# Altium PCB BCK_REVA.PcbDoc (part 1 of 2)
Units mm, origin at the board's own origin, x right, y up, seen from the top; angles counter-clockwise.
Board outline 99.5 x 146.8 mm, 4 copper layers (Top Layer, Plane (MIXED), Plane (GND), Bottom Layer), stack 1.586 mm thick; 27 components, 72 nets, 792 pads, 1035 vias.
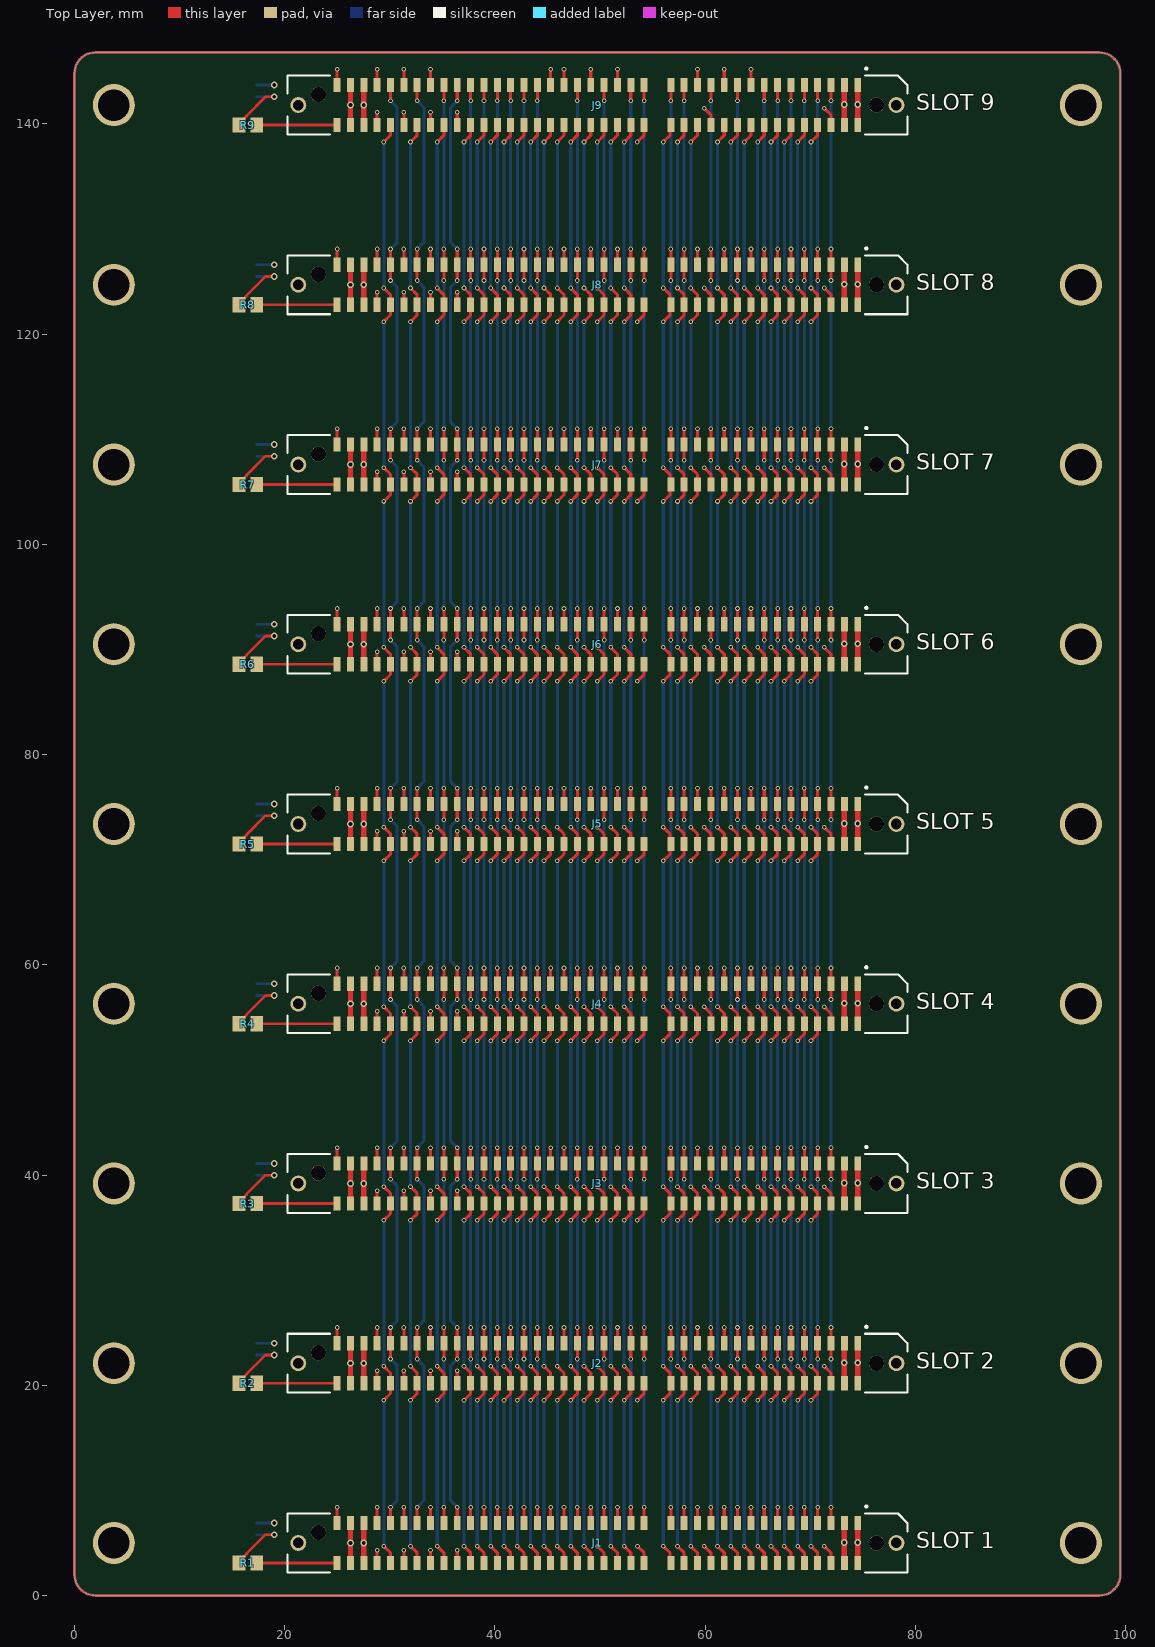
[diagram p0: Top Layer view]
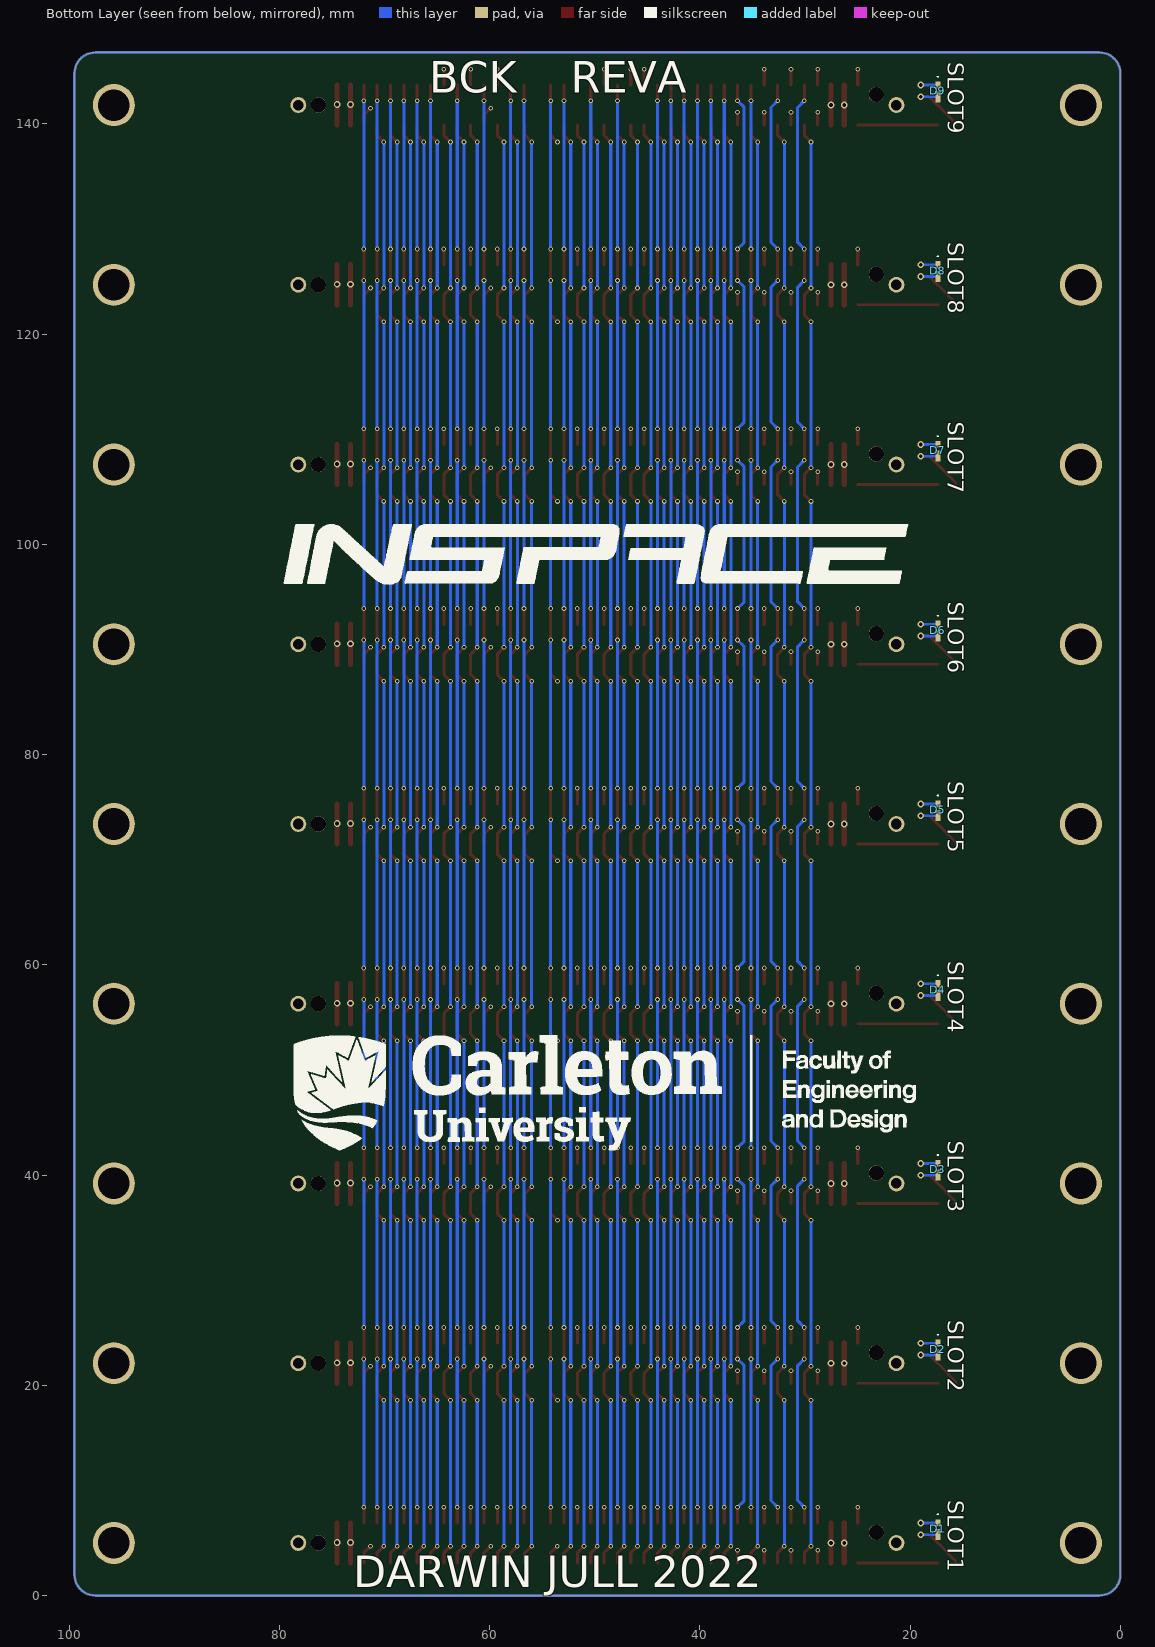
[diagram p1: Bottom Layer view, seen from below]
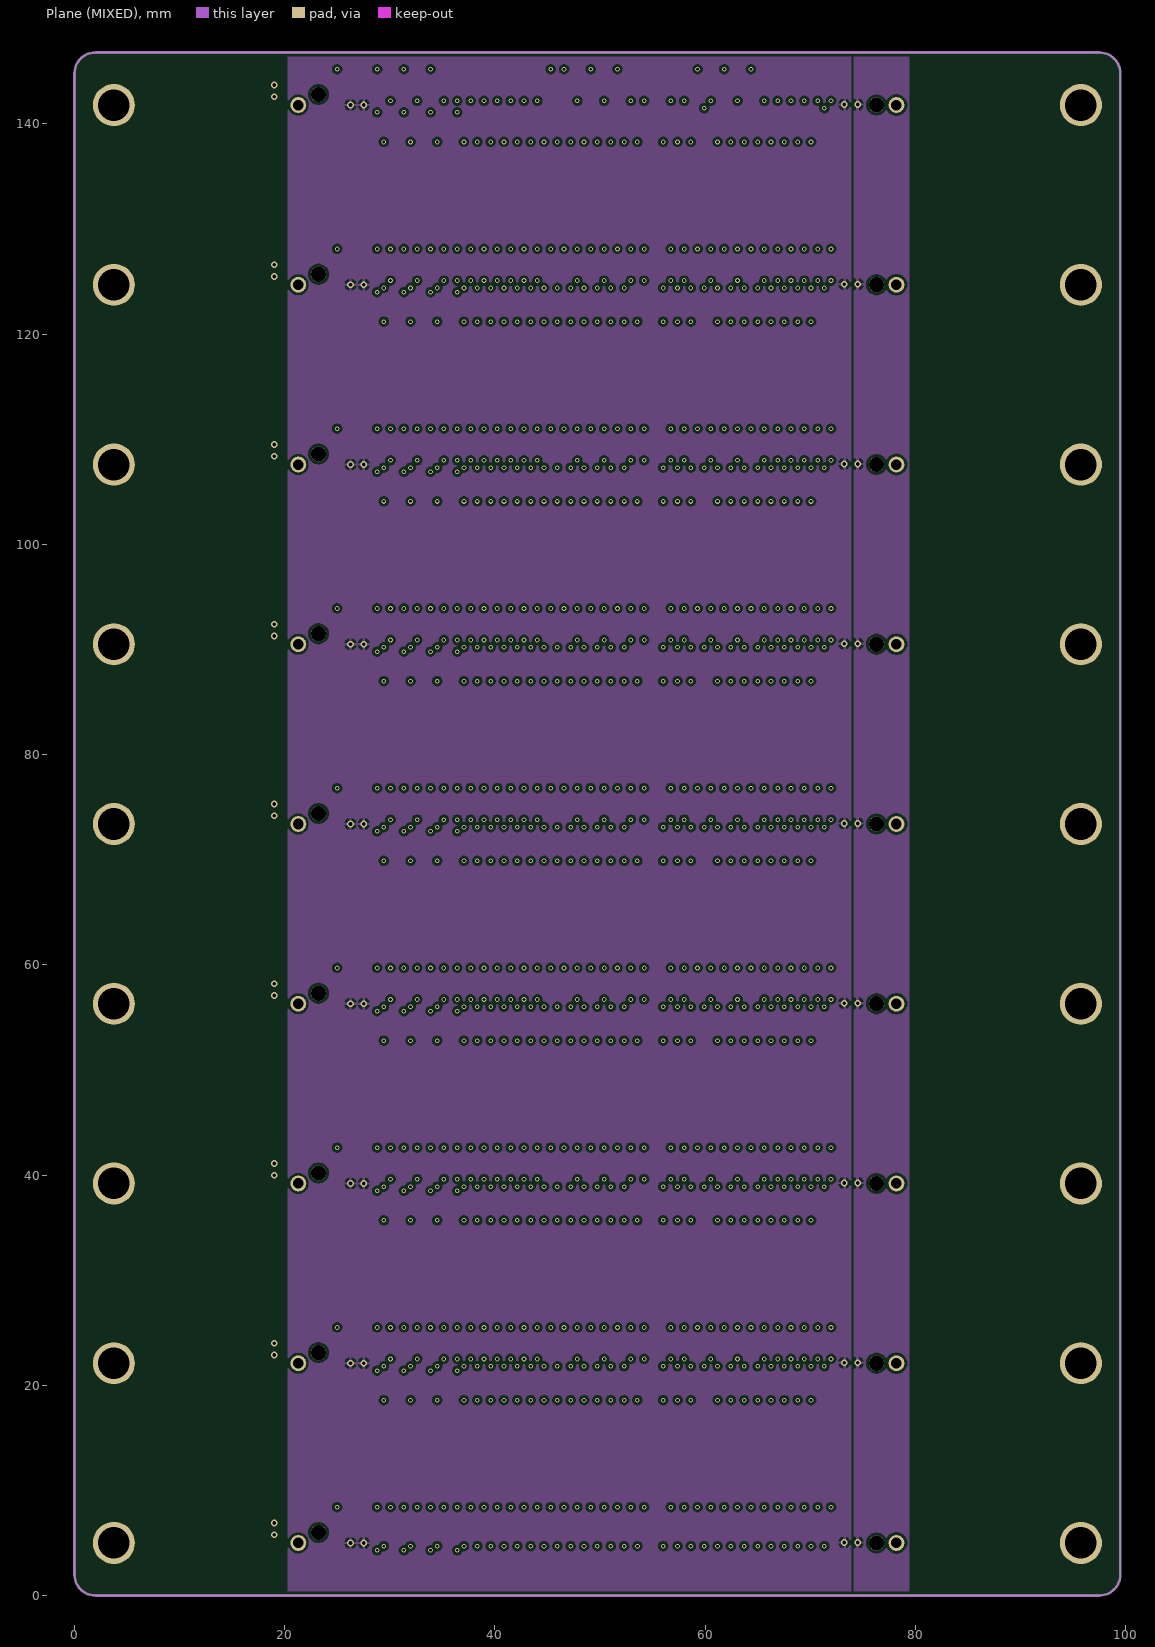
[diagram p2: Plane (MIXED)]
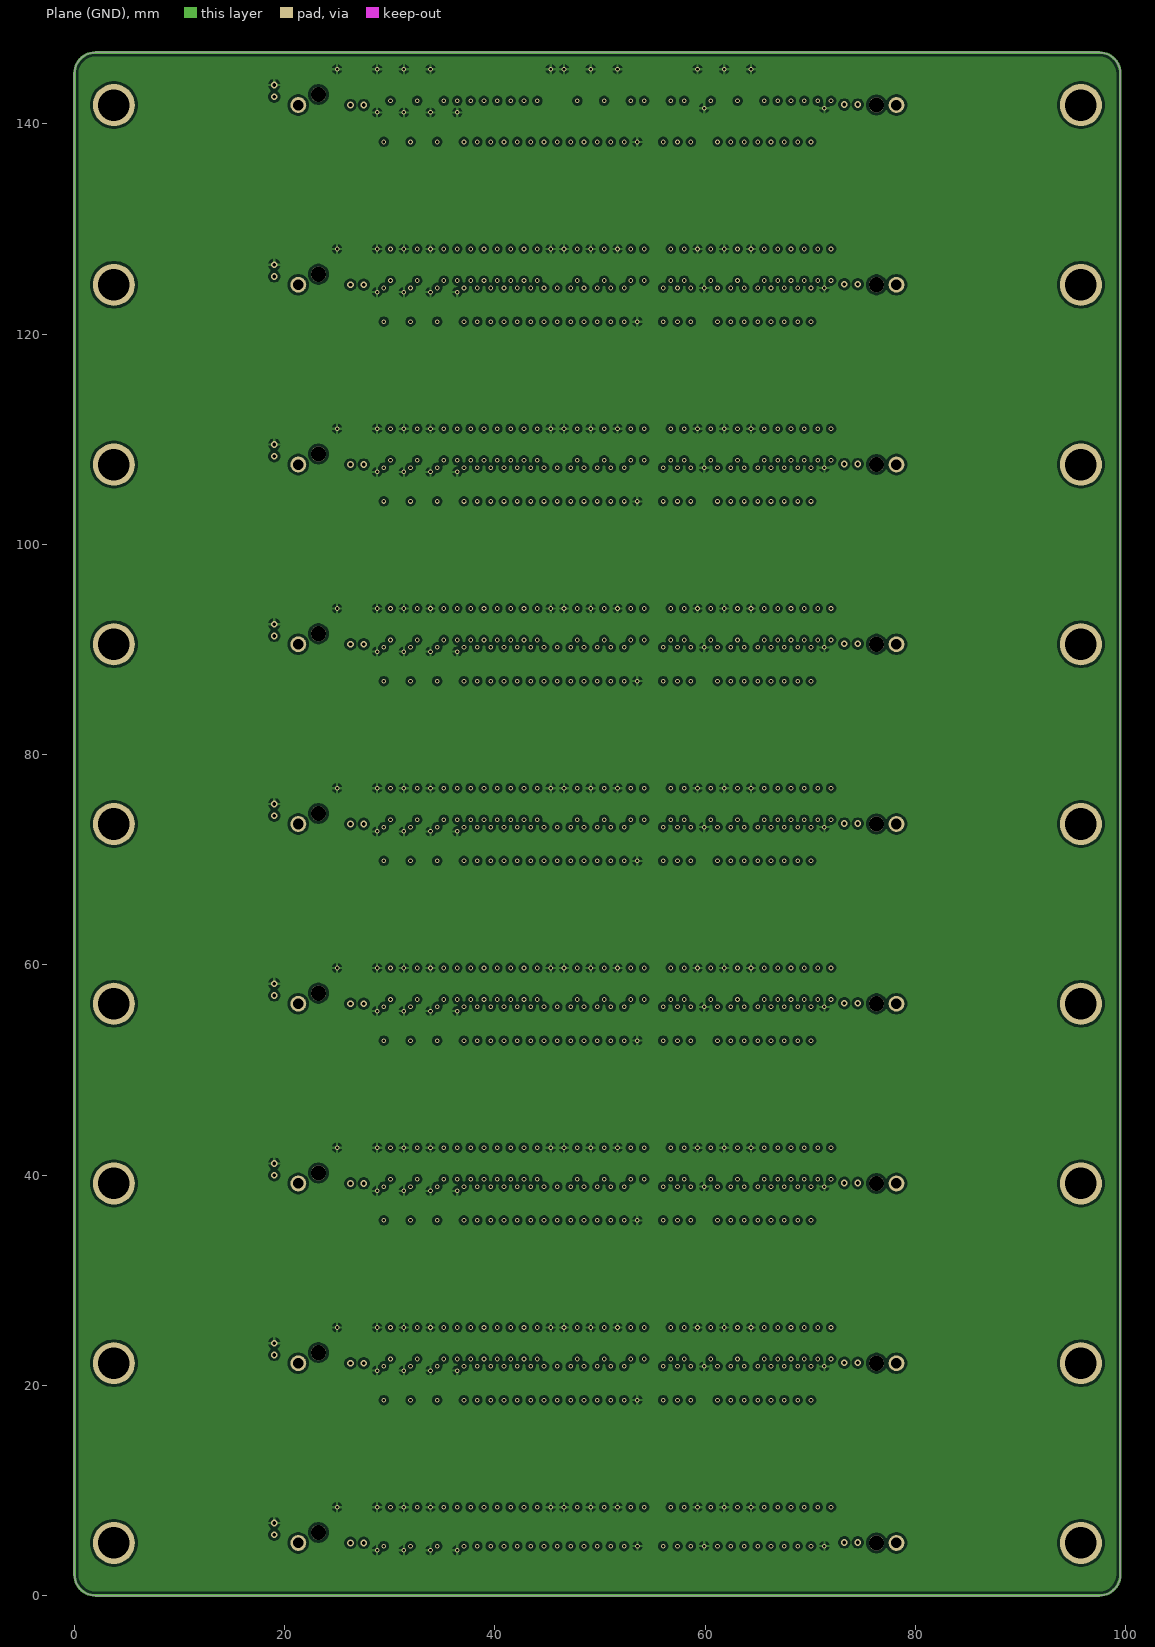
[diagram p3: Plane (GND)]

## Layer stack, top to bottom
Top Solder: solder mask 0.0203, Solder Resist, Dk 3.8
Top Layer: signal copper 0.035
Dielectric 2: prepreg 0.2104, PP-006, Dk 4.6
Plane (MIXED): signal copper 0.0152
Dielectric 1: core 1.065, FR-4, Dk 4.6
Plane (GND): signal copper 0.0152
Dielectric 3: prepreg 0.2104, PP-006, Dk 4.6
Bottom Layer: signal copper 0.035
Bottom Solder: solder mask 0.0203, Solder Resist, Dk 3.8

## Board outline
0,2 0,144.8 cw(c2,144.8) 2,146.8 97.5,146.8 cw(c97.5,144.8) 99.5,144.8 99.5,2 cw(c97.5,2) 97.5,0 2,0 cw(c2,2)

## Design rules (kind name [scope] priority, off if disabled: settings)
Clearance [All] p1: gap=0.254 ignorepadtopadclearanceinfootprint=TRUE except(0: Arc-Hole Track-Hole SMDPad-Hole THPad-Hole Via-Hole Fill-Hole Poly-Hole Region-Hole Text-Hole; 0.127: Arc-Arc Arc-Track Track-Track SMDPad-SMDPad THPad-THPad)
PlaneConnect [All] p1: pad.planeconnectstyle=Relief pad.reliefexpansion=0.508 pad.reliefentries=4 pad.reliefconductorwidth=0.254 pad.reliefairgap=0.254 via.planeconnectstyle=Direct via.reliefexpansion=0.508 via.reliefentries=4 via.reliefconductorwidth=0.254 via.reliefairgap=0.254
PolygonConnect [All] p1: connectstyle=Relief reliefconductorwidth=0.254 reliefentries=4 polygonreliefangle="90 Angle" airgapwidth=0.254
RoutingVias [All] p1: holewidth=0.254 width=0.445 viastyle="Through Hole" minholewidth=0.2 minwidth=0.4 maxholewidth=6.3 maxwidth=6.4
SolderMaskExpansion [All] p1: expansion=0.102 istentingtop=FALSE
Width [All] p1: maxlimit=2.5 minlimit=0.127 preferedwidth=0.293 midlayer1_minwidth=0.254 midlayer1_maxwidth=0.254 midlayer1_prefwidth=0.254 midlayer2_minwidth=0.254 midlayer2_maxwidth=0.254 midlayer2_prefwidth=0.254 minimp=50.000000 maximp=50.000000 favimp=50.000000
29 further rules are at their usual default settings.

## Classes and differential pairs
component class BCK_REVA_3: D7 D8 D9 J7 J8 J9 R7 R8 R9
component class BCK_REVA_2: D4 D5 D6 J4 J5 J6 R4 R5 R6
component class BCK_REVA: D1 D2 D3 J1 J2 J3 R1 R2 R3

## Components (designator, comment, footprint, x,y, rotation, side; value= is the part's Value field where it differs from the comment)
D1 "KP_DELPS1.FP-QISI-34-U515-2-S" KPDELPS1FPQISI34U5152S 17.35,6.26 r270 bottom locked
D2 "KP_DELPS1.FP-QISI-34-U515-2-S" KPDELPS1FPQISI34U5152S 17.35,23.36 r270 bottom locked
D3 "KP_DELPS1.FP-QISI-34-U515-2-S" KPDELPS1FPQISI34U5152S 17.35,40.46 r270 bottom locked
D4 "KP_DELPS1.FP-QISI-34-U515-2-S" KPDELPS1FPQISI34U5152S 17.35,57.56 r270 bottom locked
D5 "KP_DELPS1.FP-QISI-34-U515-2-S" KPDELPS1FPQISI34U5152S 17.35,74.66 r270 bottom locked
D6 "KP_DELPS1.FP-QISI-34-U515-2-S" KPDELPS1FPQISI34U5152S 17.35,91.76 r270 bottom locked
D7 "KP_DELPS1.FP-QISI-34-U515-2-S" KPDELPS1FPQISI34U5152S 17.35,108.86 r270 bottom locked
D8 "KP_DELPS1.FP-QISI-34-U515-2-S" KPDELPS1FPQISI34U5152S 17.35,125.96 r270 bottom locked
D9 "KP_DELPS1.FP-QISI-34-U515-2-S" KPDELPS1FPQISI34U5152S 17.35,143.06 r270 bottom locked
J1 "MECF-40-01-X-DV-WT" SAMTEC_MECF-40-01-X-DV-WT 49.75,5 r180 top locked
J2 "MECF-40-01-X-DV-WT" SAMTEC_MECF-40-01-X-DV-WT 49.75,22.1 r180 top locked
J3 "MECF-40-01-X-DV-WT" SAMTEC_MECF-40-01-X-DV-WT 49.75,39.2 r180 top locked
J4 "MECF-40-01-X-DV-WT" SAMTEC_MECF-40-01-X-DV-WT 49.75,56.3 r180 top locked
J5 "MECF-40-01-X-DV-WT" SAMTEC_MECF-40-01-X-DV-WT 49.75,73.4 r180 top locked
J6 "MECF-40-01-X-DV-WT" SAMTEC_MECF-40-01-X-DV-WT 49.75,90.5 r180 top locked
J7 "MECF-40-01-X-DV-WT" SAMTEC_MECF-40-01-X-DV-WT 49.75,107.6 r180 top locked
J8 "MECF-40-01-X-DV-WT" SAMTEC_MECF-40-01-X-DV-WT 49.75,124.7 r180 top locked
J9 "MECF-40-01-X-DV-WT" SAMTEC_MECF-40-01-X-DV-WT 49.75,141.8 r180 top locked
R1 "ERA6AEB201V" RESC2013X60X40NL20T25 16.5,3.095 r180 top locked
R2 "ERA6AEB201V" RESC2013X60X40NL20T25 16.5,20.195 r180 top
R3 "ERA6AEB201V" RESC2013X60X40NL20T25 16.5,37.295 r180 top locked
R4 "ERA6AEB201V" RESC2013X60X40NL20T25 16.5,54.395 r180 top locked
R5 "ERA6AEB201V" RESC2013X60X40NL20T25 16.5,71.495 r180 top locked
R6 "ERA6AEB201V" RESC2013X60X40NL20T25 16.5,88.595 r180 top locked
R7 "ERA6AEB201V" RESC2013X60X40NL20T25 16.5,105.695 r180 top locked
R8 "ERA6AEB201V" RESC2013X60X40NL20T25 16.5,122.795 r180 top locked
R9 "ERA6AEB201V" RESC2013X60X40NL20T25 16.5,139.895 r180 top locked

## Footprints (in the part's own frame and the unit in brackets; to place one, negate y for a bottom-side part, rotate by r counter-clockwise, add the part's x,y. Pads: shape width x height; smd on the part's side, far side on the other; paste and mask are expansions set on the pad)
KPDELPS1FPQISI34U5152S [mm]
  rect 0.7x0.5 smd: 1(-0.645,0)
  rect 1.05x0.5 smd: 2(0.47,0)
  silkscreen extent -1.5,-0.05 -1.4,0.05
RESC2013X60X40NL20T25 [mm] "Chip Resistor, 2-Leads, Body 2.00x1.25mm, IPC Medium Density"
  rect 1.2x1.45 smd: 1(-0.85,0) 2(0.85,0)
  body extent -1.1,-0.72 1.1,0.72, height 0.6
SAMTEC_MECF-40-01-X-DV-WT [mm]
  rect 0.66x1.35 smd: 01(-24.765,-1.905) 02(-24.765,1.905) 03(-23.495,-1.905) 04(-23.495,1.905) 05(-22.225,-1.905) 06(-22.225,1.905) 07(-20.955,-1.905) 08(-20.955,1.905) 09(-19.685,-1.905) 10(-19.685,1.905) 11(-18.415,-1.905) 12(-18.415,1.905) 13(-17.145,-1.905) 14(-17.145,1.905) 15(-15.875,-1.905) 16(-15.875,1.905) 17(-14.605,-1.905) 18(-14.605,1.905) 19(-13.335,-1.905) 20(-13.335,1.905) 21(-12.065,-1.905) 22(-12.065,1.905) 23(-10.795,-1.905) 24(-10.795,1.905) 25(-9.525,-1.905) 26(-9.525,1.905) 27(-8.255,-1.905) 28(-8.255,1.905) 29(-6.985,-1.905) 30(-6.985,1.905) 31(-4.445,-1.905) 32(-4.445,1.905) 33(-3.175,-1.905) 34(-3.175,1.905) 35(-1.905,-1.905) 36(-1.905,1.905) 37(-0.635,-1.905) 38(-0.635,1.905) 39(0.635,-1.905) 40(0.635,1.905) 41(1.905,-1.905) 42(1.905,1.905) 43(3.175,-1.905) 44(3.175,1.905) 45(4.445,-1.905) 46(4.445,1.905) 47(5.715,-1.905) 48(5.715,1.905) 49(6.985,-1.905) 50(6.985,1.905) 51(8.255,-1.905) 52(8.255,1.905) 53(9.525,-1.905) 54(9.525,1.905) 55(10.795,-1.905) 56(10.795,1.905) 57(12.065,-1.905) 58(12.065,1.905) 59(13.335,-1.905) 60(13.335,1.905) 61(14.605,-1.905) 62(14.605,1.905) 63(15.875,-1.905) 64(15.875,1.905) 65(17.145,-1.905) 66(17.145,1.905) 67(18.415,-1.905) 68(18.415,1.905) 69(19.685,-1.905) 70(19.685,1.905) 71(20.955,-1.905) 72(20.955,1.905) 73(22.225,-1.905) 74(22.225,1.905) 75(23.495,-1.905) 76(23.495,1.905) 77(24.765,-1.905) 78(24.765,1.905)
  round 1.508 hole 1: S1(-28.45,0) S2(28.45,0)
  round 1.45 hole 1.45 unplated: ""(-26.55,0) ""(26.54,-1)
  silkscreen extent -29.49,-3.56 29.49,2.8

## Part data
D1 D2 D3 D4 D5 D6 D7 D8 D9: "High Power LEDs - Single Color Pure Green TOPLED E1608", Manufacturer_Name="AMS OSRAM GROUP", Manufacturer_Part_Number="KP DELPS1.FP-QISI-34-U515-2-S", Mouser Part Number=720-KPDELPS1FPA0817, Datasheet Link=https://www.dialog-semiconductor.com/sites/default/files/2021-09/DA14531_datasheet_3v4.pdf, Geometry.Height=0.7mm, Mouser Price/Stock=https://www.mouser.co.uk/ProductDetail/ams-OSRAM/KP-DELPS1FP-QISI-34-U515-2-S?qs=CiayqK2gdcI39hBNO3GmaQ%3D%3D
J1 J2 J3 J4 J5 J6 J7 J8 J9: "MECF .050\" EDGE CARD ASSEMBLY", Package=None, Availability=Unavailable, MF=Samtec, MP=MECF-40-01-X-DV-WT, Price=None
R1 R2 R3 R4 R5 R6 R7 R8 R9: library part CMP-2001-00608-1, Manufacturer=Panasonic, Part Number=ERA6AEB201V

## Free pads (board coordinates)
  round 4 hole 3: 1(3.75,5) 2(3.75,22.1) 3(3.75,39.2) 4(3.75,56.3) 5(3.75,73.4) 6(3.75,90.5) 7(3.75,107.6) 8(3.75,124.7) 9(3.75,141.8) 10(95.75,5) 11(95.75,22.1) 12(95.75,39.2) 13(95.75,56.3) 14(95.75,73.4) 15(95.75,90.5) 16(95.75,107.6) 17(95.75,124.7) 18(95.75,141.8)

## Via types
v1: diameter 0.445, hole 0.254, Top Layer to Bottom Layer, 961 vias
v2: diameter 0.635, hole 0.356, Top Layer to Bottom Layer, 56 vias
v3: diameter 0.444, hole 0.254, Top Layer to Bottom Layer, 18 vias

## Nets (pads, with @x,y where several pads share a name; then routed paths per layer and width w, separated by ;. In a path a pad name is that pad's centre, name@x,y a point inside that pad or via, vN(x,y) a via of type N, cw(c..) or ccw(c..) an arc to the next point about the centre after c; other vN are vias at no path point)
+3.3V: J1.03 J1.04 J1.73 J1.74 J1.75 J1.76 J2.03 J2.04 J2.73 J2.74 J2.75 J2.76 J3.03 J3.04 J3.73 J3.74 J3.75 J3.76 J4.03 J4.04 J4.73 J4.74 J4.75 J4.76 J5.03 J5.04 J5.73 J5.74 J5.75 J5.76 J6.03 J6.04 J6.73 J6.74 J6.75 J6.76 J7.03 J7.04 J7.73 J7.74 J7.75 J7.76 J8.03 J8.04 J8.73 J8.74 J8.75 J8.76 J9.03 J9.04 J9.73 J9.74 J9.75 J9.76 | length 106.7
  Top Layer w0.5: J1.76@26.255,3.095 J1.75@26.255,6.905 ; J2.76@26.255,20.195 J2.75@26.255,24.005 ; J3.76@26.255,37.295 J3.75@26.255,41.105 ; J4.76@26.255,54.395 J4.75@26.255,58.205 ; J5.76@26.255,71.495 J5.75@26.255,75.305 ; J6.76@26.255,88.595 J6.75@26.255,92.405 ; J7.76@26.255,105.695 J7.75@26.255,109.505 ; J8.76@26.255,122.795 J8.75@26.255,126.605 ; J9.76@26.255,139.895 J9.75@26.255,143.705 ; J1.74@27.525,3.095 J1.73@27.525,6.905 ; J2.74@27.525,20.195 J2.73@27.525,24.005 ; J3.74@27.525,37.295 J3.73@27.525,41.105 ; J4.74@27.525,54.395 J4.73@27.525,58.205 ; J5.74@27.525,71.495 J5.73@27.525,75.305 ; J6.74@27.525,88.595 J6.73@27.525,92.405 ; J7.74@27.525,105.695 J7.73@27.525,109.505 ; J8.74@27.525,122.795 J8.73@27.525,126.605 ; J9.74@27.525,139.895 J9.73@27.525,143.705 ; J1.04@73.245,3.095 v2(73.245,5.045) J1.03@73.245,6.905 ; J3.04@73.245,37.295 v2(73.245,39.245) J3.03@73.245,41.105 ; J4.04@73.245,54.395 v2(73.245,56.345) J4.03@73.245,58.205 ; J5.04@73.245,71.495 v2(73.245,73.445) J5.03@73.245,75.305 ; J6.04@73.245,88.595 v2(73.245,90.545) J6.03@73.245,92.405 ; J7.04@73.245,105.695 v2(73.245,107.645) J7.03@73.245,109.505 ; J8.04@73.245,122.795 v2(73.245,124.745) J8.03@73.245,126.605 ; J9.04@73.245,139.895 v2(73.245,141.845) J9.03@73.245,143.705 ; v2(73.245,22.145) J2.03@73.245,24.005 v2(73.245,22.145) ; v2(73.245,22.145) J2.04@73.245,20.195 v2(73.245,22.145)
  other v2: 26.255,5 27.525,5 26.255,22.1 27.525,22.1 73.245,22.145 26.255,39.2 27.525,39.2 26.255,56.3 27.525,56.3 26.255,73.4 27.525,73.4 26.255,90.5 27.525,90.5 26.255,107.6 27.525,107.6 26.255,124.7 27.525,124.7 26.255,141.8 27.525,141.8
+5V: J1.01 J1.02 J2.01 J2.02 J3.01 J3.02 J4.01 J4.02 J5.01 J5.02 J6.01 J6.02 J7.01 J7.02 J8.01 J8.02 J9.01 J9.02 | length 34.3
  Top Layer w0.5: J1.02@74.515,3.095 v2(74.515,5.045) J1.01@74.515,6.905 ; J2.02@74.515,20.195 v2(74.515,22.145) J2.01@74.515,24.005 ; J3.02@74.515,37.295 v2(74.515,39.245) J3.01@74.515,41.105 ; J4.02@74.515,54.395 v2(74.515,56.345) J4.01@74.515,58.205 ; J5.02@74.515,71.495 v2(74.515,73.445) J5.01@74.515,75.305 ; J6.02@74.515,88.595 v2(74.515,90.545) J6.01@74.515,92.405 ; J7.02@74.515,105.695 v2(74.515,107.645) J7.01@74.515,109.505 ; J8.02@74.515,122.795 v2(74.515,124.745) J8.01@74.515,126.605 ; J9.02@74.515,139.895 v2(74.515,141.845) J9.01@74.515,143.705
A0: J1.22 J2.22 J3.22 J4.22 J5.22 J6.22 J7.22 J8.22 J9.22 | length 141
  Top Layer w0.293: v1(61.18,4.7) 61.815,4.065 J1.22@61.815,3.095 ; v1(61.18,18.59) 61.815,19.225 J2.22@61.815,20.195 61.815,21.165 v1(61.18,21.8) ; v1(61.18,35.69) 61.815,36.325 J3.22@61.815,37.295 61.815,38.265 v1(61.18,38.9) ; v1(61.18,52.79) 61.815,53.425 J4.22@61.815,54.395 61.815,55.365 v1(61.18,56) ; v1(61.18,69.89) 61.815,70.525 J5.22@61.815,71.495 61.815,72.465 v1(61.18,73.1) ; v1(61.18,86.99) 61.815,87.625 J6.22@61.815,88.595 61.815,89.565 v1(61.18,90.2) ; v1(61.18,104.09) 61.815,104.725 J7.22@61.815,105.695 61.815,106.665 v1(61.18,107.3) ; v1(61.18,121.19) 61.815,121.825 61.815,123.765 v1(61.18,124.4) ; v1(61.18,138.29) 61.815,138.925 J9.22@61.815,139.895
  Bottom Layer w0.293: v1(61.18,4.7) v1(61.18,18.59) ; v1(61.18,21.8) v1(61.18,35.69) ; v1(61.18,38.9) v1(61.18,52.79) ; v1(61.18,56) v1(61.18,69.89) ; v1(61.18,73.1) v1(61.18,86.99) ; v1(61.18,90.2) v1(61.18,104.09) ; v1(61.18,107.3) v1(61.18,121.19) ; v1(61.18,124.4) v1(61.18,138.29)
A1: J1.20 J2.20 J3.20 J4.20 J5.20 J6.20 J7.20 J8.20 J9.20 | length 141
  Top Layer w0.293: v1(62.45,4.7) 63.085,4.065 J1.20@63.085,3.095 ; v1(62.45,18.59) 63.085,19.225 63.085,21.165 v1(62.45,21.8) ; v1(62.45,35.69) 63.085,36.325 63.085,38.265 v1(62.45,38.9) ; v1(62.45,52.79) 63.085,53.425 63.085,55.365 v1(62.45,56) ; v1(62.45,69.89) 63.085,70.525 63.085,72.465 v1(62.45,73.1) ; v1(62.45,86.99) 63.085,87.625 63.085,89.565 v1(62.45,90.2) ; v1(62.45,104.09) 63.085,104.725 63.085,106.665 v1(62.45,107.3) ; v1(62.45,121.19) 63.085,121.825 63.085,123.765 v1(62.45,124.4) ; v1(62.45,138.29) 63.085,138.925 J9.20@63.085,139.895
  Bottom Layer w0.293: v1(62.45,4.7) v1(62.45,18.59) ; v1(62.45,21.8) v1(62.45,35.69) ; v1(62.45,38.9) v1(62.45,52.79) ; v1(62.45,56) v1(62.45,69.89) ; v1(62.45,73.1) v1(62.45,86.99) ; v1(62.45,90.2) v1(62.45,104.09) ; v1(62.45,107.3) v1(62.45,121.19) ; v1(62.45,124.4) v1(62.45,138.29)
A2: J1.18 J2.18 J3.18 J4.18 J5.18 J6.18 J7.18 J8.18 J9.18 | length 141
  Top Layer w0.293: v1(63.72,4.7) 64.355,4.065 J1.18@64.355,3.095 ; v1(63.72,18.59) 64.355,19.225 J2.18@64.355,20.195 64.355,21.165 v1(63.72,21.8) ; v1(63.72,35.69) 64.355,36.325 J3.18@64.355,37.295 64.355,38.265 v1(63.72,38.9) ; v1(63.72,52.79) 64.355,53.425 J4.18@64.355,54.395 64.355,55.365 v1(63.72,56) ; v1(63.72,69.89) 64.355,70.525 J5.18@64.355,71.495 64.355,72.465 v1(63.72,73.1) ; v1(63.72,86.99) 64.355,87.625 J6.18@64.355,88.595 64.355,89.565 v1(63.72,90.2) ; v1(63.72,104.09) 64.355,104.725 64.355,106.665 v1(63.72,107.3) ; v1(63.72,121.19) 64.355,121.825 64.355,123.765 v1(63.72,124.4) ; v1(63.72,138.29) 64.355,138.925 J9.18@64.355,139.895
  Bottom Layer w0.293: v1(63.72,4.7) v1(63.72,18.59) ; v1(63.72,21.8) v1(63.72,35.69) ; v1(63.72,38.9) v1(63.72,52.79) ; v1(63.72,56) v1(63.72,69.89) ; v1(63.72,73.1) v1(63.72,86.99) ; v1(63.72,90.2) v1(63.72,104.09) ; v1(63.72,107.3) v1(63.72,121.19) ; v1(63.72,124.4) v1(63.72,138.29)
A3: J1.16 J2.16 J3.16 J4.16 J5.16 J6.16 J7.16 J8.16 J9.16 | length 141
  Top Layer w0.293: v1(64.99,4.7) 65.625,4.065 J1.16@65.625,3.095 ; v1(64.99,18.59) v1@65,18.6 ; v1(64.99,21.8) 65.625,21.165 65.625,19.225 v1@65,18.6 ; v1(64.99,35.69) 65.625,36.325 J3.16@65.625,37.295 65.625,38.265 v1(64.99,38.9) ; v1(64.99,52.79) 65.625,53.425 J4.16@65.625,54.395 65.625,55.365 v1(64.99,56) ; v1(64.99,69.89) 65.625,70.525 J5.16@65.625,71.495 65.625,72.465 v1(64.99,73.1) ; v1(64.99,86.99) 65.625,87.625 J6.16@65.625,88.595 65.625,89.565 v1(64.99,90.2) ; v1(64.99,104.09) 65.625,104.725 65.625,106.665 v1(64.99,107.3) ; v1(64.99,121.19) 65.625,121.825 65.625,123.765 v1(64.99,124.4) ; v1(64.99,138.29) 65.625,138.925 J9.16@65.625,139.895 ; v1@65,18.59 v1@65,18.6
  Bottom Layer w0.293: v1(64.99,4.7) v1(64.99,18.59) ; v1(64.99,38.9) v1(64.99,52.79) ; v1(64.99,56) v1(64.99,69.89) ; v1(64.99,73.1) v1(64.99,86.99) ; v1(64.99,90.2) v1(64.99,104.09) ; v1(64.99,107.3) v1(64.99,121.19) ; v1(64.99,124.4) v1(64.99,138.29) ; v1@64.995,21.805 v1(64.99,21.8) v1(64.99,35.69) v1@64.995,35.685
A4: J1.14 J2.14 J3.14 J4.14 J5.14 J6.14 J7.14 J8.14 J9.14 | length 141.2
  Top Layer w0.293: v1(66.26,4.7) 66.895,4.065 J1.14@66.895,3.095 ; v1(66.26,18.59) 66.895,19.225 J2.14@66.895,20.195 66.895,21.165 v1(66.26,21.8) ; v1(66.26,35.69) 66.895,36.325 J3.14@66.895,37.295 66.895,38.265 v1(66.26,38.9) ; v1(66.26,52.79) 66.895,53.425 J4.14@66.895,54.395 66.895,55.365 v1(66.26,56) ; v1(66.26,69.89) 66.895,70.525 J5.14@66.895,71.495 66.895,72.465 v1(66.26,73.1) ; v1(66.26,86.99) 66.895,87.625 J6.14@66.895,88.595 66.895,89.565 v1(66.26,90.2) ; v1(66.26,104.09) 66.895,104.725 J7.14@66.895,105.695 66.895,106.665 v1(66.26,107.3) ; v1(66.26,121.19) 66.895,121.825 J8.14@66.895,122.795 66.895,123.765 v1(66.26,124.4) ; v1(66.26,138.29) 66.895,138.925 J9.14@66.895,139.895 ; v1@66.3,35.69 v1@66.3,35.727 ; v1@66.3,52.79 v1@66.3,52.827 ; v1@66.3,69.89 v1@66.3,69.927 ; v1@66.3,86.99 v1@66.3,87.027 ; v1@66.3,104.09 v1@66.3,104.127 ; v1@66.3,121.19 v1@66.3,121.227
  Bottom Layer w0.293: v1(66.26,4.7) v1(66.26,18.59) ; v1(66.26,21.8) v1(66.26,35.69) ; v1(66.26,38.9) v1(66.26,52.79) ; v1(66.26,56) v1(66.26,69.89) ; v1(66.26,73.1) v1(66.26,86.99) ; v1(66.26,90.2) v1(66.26,104.09) ; v1(66.26,107.3) v1(66.26,121.19) ; v1(66.26,124.4) v1(66.26,138.29)
A5: J1.12 J2.12 J3.12 J4.12 J5.12 J6.12 J7.12 J8.12 J9.12 | length 141
  Top Layer w0.293: v1(67.53,4.7) 68.165,4.065 J1.12@68.165,3.095 ; v1(67.53,18.59) 68.165,19.225 68.165,21.165 v1(67.53,21.8) ; v1(67.53,35.69) 68.165,36.325 68.165,38.265 v1(67.53,38.9) ; v1(67.53,52.79) 68.165,53.425 J4.12@68.165,54.395 68.165,55.365 v1(67.53,56) ; v1(67.53,69.89) 68.165,70.525 J5.12@68.165,71.495 68.165,72.465 v1(67.53,73.1) ; v1(67.53,86.99) 68.165,87.625 68.165,89.565 v1(67.53,90.2) ; v1(67.53,104.09) 68.165,104.725 J7.12@68.165,105.695 68.165,106.665 v1(67.53,107.3) ; v1(67.53,121.19) 68.165,121.825 J8.12@68.165,122.795 68.165,123.765 v1(67.53,124.4) ; v1(67.53,138.29) 68.165,138.925 J9.12@68.165,139.895
  Bottom Layer w0.293: v1(67.53,4.7) v1(67.53,18.59) ; v1(67.53,21.8) v1(67.53,35.69) ; v1(67.53,38.9) v1(67.53,52.79) ; v1(67.53,56) v1(67.53,69.89) ; v1(67.53,73.1) v1(67.53,86.99) ; v1(67.53,90.2) v1(67.53,104.09) ; v1(67.53,107.3) v1(67.53,121.19) ; v1(67.53,124.4) v1(67.53,138.29)
A6: J1.10 J2.10 J3.10 J4.10 J5.10 J6.10 J7.10 J8.10 J9.10 | length 141
  Top Layer w0.293: v1(68.8,4.7) 69.435,4.065 J1.10@69.435,3.095 ; v1(68.8,18.59) 69.435,19.225 J2.10@69.435,20.195 69.435,21.165 v1(68.8,21.8) ; v1(68.8,35.69) 69.435,36.325 69.435,38.265 v1(68.8,38.9) ; v1(68.8,52.79) 69.435,53.425 69.435,55.365 v1(68.8,56) ; v1(68.8,69.89) 69.435,70.525 69.435,72.465 v1(68.8,73.1) ; v1(68.8,86.99) 69.435,87.625 69.435,89.565 v1(68.8,90.2) ; v1(68.8,104.09) 69.435,104.725 69.435,106.665 v1(68.8,107.3) ; v1(68.8,121.19) 69.435,121.825 69.435,123.765 v1(68.8,124.4) ; v1(68.8,138.29) 69.435,138.925 J9.10@69.435,139.895
  Bottom Layer w0.293: v1(68.8,4.7) v1(68.8,18.59) ; v1(68.8,21.8) v1(68.8,35.69) ; v1(68.8,38.9) v1(68.8,52.79) ; v1(68.8,56) v1(68.8,69.89) ; v1(68.8,73.1) v1(68.8,86.99) ; v1(68.8,90.2) v1(68.8,104.09) ; v1(68.8,107.3) v1(68.8,121.19) ; v1(68.8,124.4) v1(68.8,138.29)
A7: J1.08 J2.08 J3.08 J4.08 J5.08 J6.08 J7.08 J8.08 J9.08 | length 141
  Top Layer w0.293: v1(70.07,4.7) 70.705,4.065 J1.08@70.705,3.095 ; v1(70.07,18.59) 70.705,19.225 70.705,21.165 v1(70.07,21.8) ; v1(70.07,35.69) 70.705,36.325 J3.08@70.705,37.295 70.705,38.265 v1(70.07,38.9) ; v1(70.07,52.79) 70.705,53.425 J4.08@70.705,54.395 70.705,55.365 v1(70.07,56) ; v1(70.07,69.89) 70.705,70.525 J5.08@70.705,71.495 70.705,72.465 v1(70.07,73.1) ; v1(70.07,86.99) 70.705,87.625 J6.08@70.705,88.595 70.705,89.565 v1(70.07,90.2) ; v1(70.07,104.09) 70.705,104.725 J7.08@70.705,105.695 70.705,106.665 v1(70.07,107.3) ; v1(70.07,121.19) 70.705,121.825 70.705,123.765 v1(70.07,124.4) ; v1(70.07,138.29) 70.705,138.925 J9.08@70.705,139.895
  Bottom Layer w0.293: v1(70.07,4.7) v1(70.07,18.59) ; v1(70.07,21.8) v1(70.07,35.69) ; v1(70.07,38.9) v1(70.07,52.79) ; v1(70.07,56) v1(70.07,69.89) ; v1(70.07,73.1) v1(70.07,86.99) ; v1(70.07,90.2) v1(70.07,104.09) ; v1(70.07,107.3) v1(70.07,121.19) ; v1(70.07,124.4) v1(70.07,138.29) ; v1@70.076,18.584 v1@70.082,18.59 ; v1@70.076,69.884 v1@70.082,69.89 ; v1@70.076,86.984 v1@70.082,86.99
A12: J1.31 J2.31 J3.31 J4.31 J5.31 J6.31 J7.31 J8.31 J9.31 | length 136.8
  Top Layer w0.293: J1.31@54.195,6.905 v1(54.195,8.405) ; v1(54.195,22.505) J2.31@54.195,24.005 v1(54.195,25.505) ; v1(54.195,39.605) J3.31@54.195,41.105 v1(54.195,42.605) ; v1(54.195,56.705) J4.31@54.195,58.205 v1(54.195,59.705) ; v1(54.195,73.805) J5.31@54.195,75.305 v1(54.195,76.805) ; v1(54.195,90.905) J6.31@54.195,92.405 v1(54.195,93.905) ; v1(54.195,108.005) J7.31@54.195,109.505 v1(54.195,111.005) ; v1(54.195,125.105) J8.31@54.195,126.605 v1(54.195,128.105) ; v1(54.195,142.205) J9.31@54.195,143.705
  Bottom Layer w0.293: v1(54.195,8.405) v1(54.195,22.505) ; v1(54.195,25.505) v1(54.195,39.605) ; v1(54.195,42.605) v1(54.195,56.705) ; v1(54.195,59.705) v1(54.195,73.805) ; v1(54.195,76.805) v1(54.195,90.905) ; v1(54.195,93.905) v1(54.195,108.005) ; v1(54.195,111.005) v1(54.195,125.105) ; v1(54.195,128.105) v1(54.195,142.205)
A13: J1.33 J2.33 J3.33 J4.33 J5.33 J6.33 J7.33 J8.33 J9.33 | length 136.8
  Top Layer w0.293: J1.33@52.925,6.905 v1(52.925,8.405) ; v1(52.925,22.505) J2.33@52.925,24.005 v1(52.925,25.505) ; v1(52.925,39.605) J3.33@52.925,41.105 v1(52.925,42.605) ; v1(52.925,56.705) J4.33@52.925,58.205 v1(52.925,59.705) ; v1(52.925,73.805) J5.33@52.925,75.305 v1(52.925,76.805) ; v1(52.925,90.905) J6.33@52.925,92.405 v1(52.925,93.905) ; v1(52.925,108.005) J7.33@52.925,109.505 v1(52.925,111.005) ; v1(52.925,125.105) J8.33@52.925,126.605 v1(52.925,128.105) ; v1(52.925,142.205) J9.33@52.925,143.705
  Bottom Layer w0.293: v1(52.925,8.405) v1(52.925,22.505) ; v1(52.925,25.505) v1(52.925,39.605) ; v1(52.925,42.605) v1(52.925,56.705) ; v1(52.925,59.705) v1(52.925,73.805) ; v1(52.925,76.805) v1(52.925,90.905) ; v1(52.925,93.905) v1(52.925,108.005) ; v1(52.925,111.005) v1(52.925,125.105) ; v1(52.925,128.105) v1(52.925,142.205)
DAC0: J1.41 J2.41 J3.41 J4.41 J5.41 J6.41 J7.41 J8.41 J9.41 | length 136.8
  Top Layer w0.293: J1.41@47.845,6.905 v1(47.845,8.405) ; v1(47.845,22.505) J2.41@47.845,24.005 v1(47.845,25.505) ; v1(47.845,39.605) J3.41@47.845,41.105 v1(47.845,42.605) ; v1(47.845,56.705) J4.41@47.845,58.205 v1(47.845,59.705) ; v1(47.845,73.805) J5.41@47.845,75.305 v1(47.845,76.805) ; v1(47.845,90.905) J6.41@47.845,92.405 v1(47.845,93.905) ; v1(47.845,108.005) J7.41@47.845,109.505 v1(47.845,111.005) ; v1(47.845,125.105) J8.41@47.845,126.605 v1(47.845,128.105) ; v1(47.845,142.205) J9.41@47.845,143.705
  Bottom Layer w0.293: v1(47.845,8.405) v1(47.845,22.505) ; v1(47.845,25.505) v1(47.845,39.605) ; v1(47.845,42.605) v1(47.845,56.705) ; v1(47.845,59.705) v1(47.845,73.805) ; v1(47.845,76.805) v1(47.845,90.905) ; v1(47.845,93.905) v1(47.845,108.005) ; v1(47.845,111.005) v1(47.845,125.105) ; v1(47.845,128.105) v1(47.845,142.205)
DAC1: J1.37 J2.37 J3.37 J4.37 J5.37 J6.37 J7.37 J8.37 J9.37 | length 136.8
  Top Layer w0.293: J1.37@50.385,6.905 v1(50.385,8.405) ; v1(50.385,22.505) J2.37@50.385,24.005 v1(50.385,25.505) ; v1(50.385,39.605) J3.37@50.385,41.105 v1(50.385,42.605) ; v1(50.385,56.705) J4.37@50.385,58.205 v1(50.385,59.705) ; v1(50.385,73.805) J5.37@50.385,75.305 v1(50.385,76.805) ; v1(50.385,90.905) J6.37@50.385,92.405 v1(50.385,93.905) ; v1(50.385,108.005) J7.37@50.385,109.505 v1(50.385,111.005) ; v1(50.385,125.105) J8.37@50.385,126.605 v1(50.385,128.105) ; v1(50.385,142.205) J9.37@50.385,143.705
  Bottom Layer w0.293: v1(50.385,8.405) v1(50.385,22.505) ; v1(50.385,25.505) v1(50.385,39.605) ; v1(50.385,42.605) v1(50.385,56.705) ; v1(50.385,59.705) v1(50.385,73.805) ; v1(50.385,76.805) v1(50.385,90.905) ; v1(50.385,93.905) v1(50.385,108.005) ; v1(50.385,111.005) v1(50.385,125.105) ; v1(50.385,128.105) v1(50.385,142.205)
GND: D1.1 D2.1 D3.1 D4.1 D5.1 D6.1 D7.1 D8.1 D9.1 J1.06 J1.17 J1.21 J1.24 J1.25 J1.32 J1.35 J1.39 J1.43 J1.45 J1.60 J1.63 J1.64 J1.67 J1.68 J1.71 J1.72 J1.77 J2.06 J2.17 J2.21 J2.24 J2.25 J2.32 J2.35 J2.39 J2.43 J2.45 J2.60 J2.63 J2.64 J2.67 J2.68 J2.71 J2.72 J2.77 J3.06 J3.17 J3.21 J3.24 J3.25 J3.32 J3.35 J3.39 J3.43 J3.45 J3.60 J3.63 J3.64 J3.67 J3.68 J3.71 J3.72 J3.77 J4.06 J4.17 J4.21 J4.24 J4.25 J4.32 J4.35 J4.39 J4.43 J4.45 J4.60 J4.63 J4.64 J4.67 J4.68 J4.71 J4.72 J4.77 J5.06 J5.17 J5.21 J5.24 J5.25 J5.32 J5.35 J5.39 J5.43 J5.45 J5.60 J5.63 J5.64 J5.67 J5.68 J5.71 J5.72 J5.77 J6.06 J6.17 J6.21 J6.24 J6.25 J6.32 J6.35 J6.39 J6.43 J6.45 J6.60 J6.63 J6.64 J6.67 J6.68 J6.71 J6.72 J6.77 J7.06 J7.17 J7.21 J7.24 J7.25 J7.32 J7.35 J7.39 J7.43 J7.45 J7.60 J7.63 J7.64 J7.67 J7.68 J7.71 J7.72 J7.77 J8.06 J8.17 J8.21 J8.24 J8.25 J8.32 J8.35 J8.39 J8.43 J8.45 J8.60 J8.63 J8.64 J8.67 J8.68 J8.71 J8.72 J8.77 J9.06 J9.17 J9.21 J9.24 J9.25 J9.32 J9.35 J9.39 J9.43 J9.45 J9.60 J9.63 J9.64 J9.67 J9.68 J9.71 J9.72 J9.77 | length 257.2
  Top Layer w0.293: J1.77@24.985,6.905 v3(24.985,8.405) ; J2.77@24.985,24.005 v3(24.985,25.505) ; J3.77@24.985,41.105 v3(24.985,42.605) ; J4.77@24.985,58.205 v3(24.985,59.705) ; J5.77@24.985,75.305 v3(24.985,76.805) ; J6.77@24.985,92.405 v3(24.985,93.905) ; J7.77@24.985,109.505 v3(24.985,111.005) ; J8.77@24.985,126.605 v3(24.985,128.105) ; J9.77@24.985,143.705 v3(24.985,145.205) ; J1.72@28.795,3.095 v1(28.795,4.299) ; J1.71@28.795,6.905 v3(28.795,8.405) ; J2.72@28.795,20.195 v1(28.795,21.399) ; J2.71@28.795,24.005 v3(28.795,25.505) ; J3.72@28.795,37.295 v1(28.795,38.499) ; J3.71@28.795,41.105 v3(28.795,42.605) ; J4.72@28.795,54.395 v1(28.795,55.599) ; J4.71@28.795,58.205 v3(28.795,59.705) ; J5.72@28.795,71.495 v1(28.795,72.699) ; J5.71@28.795,75.305 v3(28.795,76.805) ; J6.72@28.795,88.595 v1(28.795,89.799) ; J6.71@28.795,92.405 v3(28.795,93.905) ; J7.72@28.795,105.695 v1(28.795,106.899) ; J7.71@28.795,109.505 v3(28.795,111.005) ; J8.72@28.795,122.795 v1(28.795,123.999) ; J8.71@28.795,126.605 v3(28.795,128.105) ; J9.72@28.795,139.895 v1(28.795,141.099) ; J9.71@28.795,143.705 v3(28.795,145.205) ; J1.68@31.335,3.095 v1(31.335,4.299) ; J1.67@31.335,6.905 v1(31.335,8.405) ; J2.68@31.335,20.195 v1(31.335,21.399) ; J2.67@31.335,24.005 v1(31.335,25.505) ; J3.68@31.335,37.295 v1(31.335,38.499) ; J3.67@31.335,41.105 v1(31.335,42.605) ; J4.68@31.335,54.395 v1(31.335,55.599) ; J4.67@31.335,58.205 v1(31.335,59.705) ; J5.68@31.335,71.495 v1(31.335,72.699) ; J5.67@31.335,75.305 v1(31.335,76.805) ; J6.68@31.335,88.595 v1(31.335,89.799) ; J6.67@31.335,92.405 v1(31.335,93.905) ; J7.68@31.335,105.695 v1(31.335,106.899) ; J7.67@31.335,109.505 v1(31.335,111.005) ; J8.68@31.335,122.795 v1(31.335,123.999) ; J8.67@31.335,126.605 v1(31.335,128.105) ; J9.68@31.335,139.895 v1(31.335,141.099) ; J9.67@31.335,143.705 v1(31.335,145.205) ; J1.64@33.875,3.095 v1(33.875,4.299) ; J1.63@33.875,6.905 v1(33.875,8.405) ; J2.64@33.875,20.195 v1(33.875,21.399) ; J2.63@33.875,24.005 v1(33.875,25.505) ; J3.64@33.875,37.295 v1(33.875,38.499) ; J3.63@33.875,41.105 v1(33.875,42.605) ; J4.64@33.875,54.395 v1(33.875,55.599) ; J4.63@33.875,58.205 v1(33.875,59.705) ; J5.64@33.875,71.495 v1(33.875,72.699) ; J5.63@33.875,75.305 v1(33.875,76.805) ; J6.64@33.875,88.595 v1(33.875,89.799) ; J6.63@33.875,92.405 v1(33.875,93.905) ; J7.64@33.875,105.695 v1(33.875,106.899) ; J7.63@33.875,109.505 v1(33.875,111.005) ; J8.64@33.875,122.795 v1(33.875,123.999) ; J8.63@33.875,126.605 v1(33.875,128.105) ; J9.64@33.875,139.895 v1(33.875,141.099) ; J9.63@33.875,143.705 v1(33.875,145.205) ; J1.60@36.415,3.095 v1(36.415,4.299) ; J2.60@36.415,20.195 v1(36.415,21.399) ; J3.60@36.415,37.295 v1(36.415,38.499) ; J4.60@36.415,54.395 v1(36.415,55.599) ; J5.60@36.415,71.495 v1(36.415,72.699) ; J6.60@36.415,88.595 v1(36.415,89.799) ; J7.60@36.415,105.695 v1(36.415,106.899) ; J8.60@36.415,122.795 v1(36.415,123.999) ; J9.60@36.415,139.895 v1(36.415,141.099) ; J1.45@45.305,6.905 v1(45.305,8.405) ; J2.45@45.305,24.005 v1(45.305,25.505) ; J3.45@45.305,41.105 v1(45.305,42.605) ; J4.45@45.305,58.205 v1(45.305,59.705) ; J5.45@45.305,75.305 v1(45.305,76.805) ; J6.45@45.305,92.405 v1(45.305,93.905) ; J7.45@45.305,109.505 v1(45.305,111.005) ; J8.45@45.305,126.605 v1(45.305,128.105) ; J9.45@45.305,143.705 v1(45.305,145.205) ; J1.43@46.575,6.905 v1(46.575,8.405) ; J2.43@46.575,24.005 v1(46.575,25.505) ; J3.43@46.575,41.105 v1(46.575,42.605) ; J4.43@46.575,58.205 v1(46.575,59.705) ; J5.43@46.575,75.305 v1(46.575,76.805) ; J6.43@46.575,92.405 v1(46.575,93.905) ; J7.43@46.575,109.505 v1(46.575,111.005) ; J8.43@46.575,126.605 v1(46.575,128.105) ; J9.43@46.575,143.705 v1(46.575,145.205) ; J1.39@49.115,6.905 v1(49.115,8.405) ; J2.39@49.115,24.005 v1(49.115,25.505) ; J3.39@49.115,41.105 v1(49.115,42.605) ; J4.39@49.115,58.205 v1(49.115,59.705) ; J5.39@49.115,75.305 v1(49.115,76.805) ; J6.39@49.115,92.405 v1(49.115,93.905) ; J7.39@49.115,109.505 v1(49.115,111.005) ; J8.39@49.115,126.605 v1(49.115,128.105) ; J9.39@49.115,143.705 v1(49.115,145.205) ; J1.35@51.655,6.905 v1(51.655,8.405) ; J2.35@51.655,24.005 v1(51.655,25.505) ; J3.35@51.655,41.105 v1(51.655,42.605) ; J4.35@51.655,58.205 v1(51.655,59.705) ; J5.35@51.655,75.305 v1(51.655,76.805) ; J6.35@51.655,92.405 v1(51.655,93.905) ; J7.35@51.655,109.505 v1(51.655,111.005) ; J8.35@51.655,126.605 v1(51.655,128.105) ; J9.35@51.655,143.705 v1(51.655,145.205) ; v1(53.548,18.59) 54.195,19.237 J2.32@54.195,20.195 ; v1(53.548,35.69) 54.195,36.337 J3.32@54.195,37.295 ; v1(53.548,52.79) 54.195,53.437 J4.32@54.195,54.395 ; v1(53.548,69.89) 54.195,70.537 J5.32@54.195,71.495 ; v1(53.548,86.99) 54.195,87.637 J6.32@54.195,88.595 ; v1(53.548,104.09) 54.195,104.737 J7.32@54.195,105.695 ; v1(53.548,121.19) 54.195,121.837 J8.32@54.195,122.795 ; v1(53.548,138.29) 54.195,138.937 J9.32@54.195,139.895 ; v1(53.56,4.7) 54.195,4.065 J1.32@54.195,3.095 ; J1.25@59.275,6.905 v1(59.275,8.405) ; J2.25@59.275,24.005 v1(59.275,25.505) ; J3.25@59.275,41.105 v1(59.275,42.605) ; J4.25@59.275,58.205 v1(59.275,59.705) ; J5.25@59.275,75.305 v1(59.275,76.805) ; J6.25@59.275,92.405 v1(59.275,93.905) ; J7.25@59.275,109.505 v1(59.275,111.005) ; J8.25@59.275,126.605 v1(59.275,128.105) ; J9.25@59.275,143.705 v1(59.275,145.205) ; v1(59.91,4.7) 60.545,4.065 J1.24@60.545,3.095 ; v1(59.91,21.8) 60.545,21.165 J2.24@60.545,20.195 ; v1(59.91,38.9) 60.545,38.265 J3.24@60.545,37.295 ; v1(59.91,56) 60.545,55.365 J4.24@60.545,54.395 ; v1(59.91,73.1) 60.545,72.465 J5.24@60.545,71.495 ; v1(59.91,90.2) 60.545,89.565 J6.24@60.545,88.595 ; v1(59.91,107.3) 60.545,106.665 J7.24@60.545,105.695 ; v1(59.91,124.4) 60.545,123.765 J8.24@60.545,122.795 ; v1(59.91,141.5) 60.545,140.865 J9.24@60.545,139.895 ; J1.21@61.815,6.905 v1(61.815,8.405) ; J2.21@61.815,24.005 v1(61.815,25.505) ; J3.21@61.815,41.105 v1(61.815,42.605) ; J4.21@61.815,58.205 v1(61.815,59.705) ; J5.21@61.815,75.305 v1(61.815,76.805) ; J6.21@61.815,92.405 v1(61.815,93.905) ; J7.21@61.815,109.505 v1(61.815,111.005) ; J8.21@61.815,126.605 v1(61.815,128.105) ; J9.21@61.815,143.705 v1(61.815,145.205) ; J1.17@64.355,6.905 v1(64.355,8.405) ; v1(64.355,25.505) J2.17@64.355,24.005 J2.17@64.364,24.014 ; J3.17@64.355,41.105 v1(64.355,42.605) ; J4.17@64.355,58.205 v1(64.355,59.705) ; J5.17@64.355,75.305 v1(64.355,76.805) ; J6.17@64.355,92.405 v1(64.355,93.905) ; J7.17@64.355,109.505 v1(64.355,111.005) ; J8.17@64.355,126.605 v1(64.355,128.105) ; J9.17@64.355,143.705 v1(64.355,145.205) ; v1@64.364,25.496 v1@64.373,25.505 ; v1(71.34,4.7) 71.975,4.065 J1.06@71.975,3.095 ; v1(71.34,21.8) 71.975,21.165 J2.06@71.975,20.195 ; v1(71.34,38.9) 71.975,38.265 J3.06@71.975,37.295 ; v1(71.34,56) 71.975,55.365 J4.06@71.975,54.395 ; v1(71.34,73.1) 71.975,72.465 J5.06@71.975,71.495 ; v1(71.34,90.2) 71.975,89.565 J6.06@71.975,88.595 ; v1(71.34,107.3) 71.975,106.665 J7.06@71.975,105.695 ; v1(71.34,124.4) 71.975,123.765 J8.06@71.975,122.795 ; v1(71.34,141.5) 71.975,140.865 J9.06@71.975,139.895
  Bottom Layer w0.254: D1.1@17.35,6.905 17.353,6.903 18.998,6.903 v2(19,6.9) ; D2.1@17.35,24.005 17.353,24.002 18.998,24.002 v2(19,24) ; D3.1@17.35,41.105 17.353,41.102 18.998,41.102 v2(19,41.1) ; D4.1@17.35,58.205 17.353,58.203 18.998,58.203 v2(19,58.2) ; D5.1@17.35,75.305 17.353,75.303 18.998,75.303 v2(19,75.3) ; D6.1@17.35,92.405 17.353,92.403 18.998,92.403 v2(19,92.4) ; D7.1@17.35,109.505 17.353,109.502 18.998,109.502 v2(19,109.5) ; D8.1@17.35,126.605 17.353,126.602 18.998,126.602 v2(19,126.6) ; D9.1@17.35,143.705 17.353,143.702 18.998,143.702 v2(19,143.7)
GPIO0: J1.58 J2.58 J3.58 J4.58 J5.58 J6.58 J7.58 J8.58 J9.58 | length 141
  Top Layer w0.293: v1(37.05,4.7) 37.685,4.065 J1.58@37.685,3.095 ; v1(37.05,18.59) 37.685,19.225 J2.58@37.685,20.195 37.685,21.165 v1(37.05,21.8) ; v1(37.05,35.69) 37.685,36.325 37.685,38.265 v1(37.05,38.9) ; v1(37.05,52.79) 37.685,53.425 37.685,55.365 v1(37.05,56) ; v1(37.05,69.89) 37.685,70.525 37.685,72.465 v1(37.05,73.1) ; v1(37.05,86.99) 37.685,87.625 37.685,89.565 v1(37.05,90.2) ; v1(37.05,104.09) 37.685,104.725 37.685,106.665 v1(37.05,107.3) ; v1(37.05,121.19) 37.685,121.825 37.685,123.765 v1(37.05,124.4) ; v1(37.05,138.29) 37.685,138.925 J9.58@37.685,139.895
  Bottom Layer w0.293: v1(37.05,4.7) v1(37.05,18.59) ; v1(37.05,21.8) v1(37.05,35.69) ; v1(37.05,38.9) v1(37.05,52.79) ; v1(37.05,56) v1(37.05,69.89) ; v1(37.05,73.1) v1(37.05,86.99) ; v1(37.05,90.2) v1(37.05,104.09) ; v1(37.05,107.3) v1(37.05,121.19) ; v1(37.05,124.4) v1(37.05,138.29)
GPIO1: J1.56 J2.56 J3.56 J4.56 J5.56 J6.56 J7.56 J8.56 J9.56 | length 141
  Top Layer w0.293: v1(38.32,4.7) 38.955,4.065 J1.56@38.955,3.095 ; v1(38.32,18.59) 38.955,19.225 J2.56@38.955,20.195 38.955,21.165 v1(38.32,21.8) ; v1(38.32,35.69) 38.955,36.325 38.955,38.265 v1(38.32,38.9) ; v1(38.32,52.79) 38.955,53.425 38.955,55.365 v1(38.32,56) ; v1(38.32,69.89) 38.955,70.525 38.955,72.465 v1(38.32,73.1) ; v1(38.32,86.99) 38.955,87.625 38.955,89.565 v1(38.32,90.2) ; v1(38.32,104.09) 38.955,104.725 38.955,106.665 v1(38.32,107.3) ; v1(38.32,121.19) 38.955,121.825 38.955,123.765 v1(38.32,124.4) ; v1(38.32,138.29) 38.955,138.925 J9.56@38.955,139.895
  Bottom Layer w0.293: v1(38.32,4.7) v1(38.32,18.59) ; v1(38.32,21.8) v1(38.32,35.69) ; v1(38.32,38.9) v1(38.32,52.79) ; v1(38.32,56) v1(38.32,69.89) ; v1(38.32,73.1) v1(38.32,86.99) ; v1(38.32,90.2) v1(38.32,104.09) ; v1(38.32,107.3) v1(38.32,121.19) ; v1(38.32,124.4) v1(38.32,138.29)
GPIO2: J1.54 J2.54 J3.54 J4.54 J5.54 J6.54 J7.54 J8.54 J9.54 | length 141
  Top Layer w0.293: v1(39.59,4.7) 40.225,4.065 J1.54@40.225,3.095 ; v1(39.59,18.59) 40.225,19.225 J2.54@40.225,20.195 40.225,21.165 v1(39.59,21.8) ; v1(39.59,35.69) 40.225,36.325 40.225,38.265 v1(39.59,38.9) ; v1(39.59,52.79) 40.225,53.425 40.225,55.365 v1(39.59,56) ; v1(39.59,69.89) 40.225,70.525 40.225,72.465 v1(39.59,73.1) ; v1(39.59,86.99) 40.225,87.625 40.225,89.565 v1(39.59,90.2) ; v1(39.59,104.09) 40.225,104.725 40.225,106.665 v1(39.59,107.3) ; v1(39.59,121.19) 40.225,121.825 40.225,123.765 v1(39.59,124.4) ; v1(39.59,138.29) 40.225,138.925 J9.54@40.225,139.895
  Bottom Layer w0.293: v1(39.59,4.7) v1(39.59,18.59) ; v1(39.59,21.8) v1(39.59,35.69) ; v1(39.59,38.9) v1(39.59,52.79) ; v1(39.59,56) v1(39.59,69.89) ; v1(39.59,73.1) v1(39.59,86.99) ; v1(39.59,90.2) v1(39.59,104.09) ; v1(39.59,107.3) v1(39.59,121.19) ; v1(39.59,124.4) v1(39.59,138.29)
GPIO3: J1.52 J2.52 J3.52 J4.52 J5.52 J6.52 J7.52 J8.52 J9.52 | length 141
  Top Layer w0.293: v1(40.86,4.7) 41.495,4.065 J1.52@41.495,3.095 ; v1(40.86,18.59) 41.495,19.225 J2.52@41.495,20.195 41.495,21.165 v1(40.86,21.8) ; v1(40.86,35.69) 41.495,36.325 41.495,38.265 v1(40.86,38.9) ; v1(40.86,52.79) 41.495,53.425 41.495,55.365 v1(40.86,56) ; v1(40.86,69.89) 41.495,70.525 41.495,72.465 v1(40.86,73.1) ; v1(40.86,86.99) 41.495,87.625 41.495,89.565 v1(40.86,90.2) ; v1(40.86,104.09) 41.495,104.725 41.495,106.665 v1(40.86,107.3) ; v1(40.86,121.19) 41.495,121.825 41.495,123.765 v1(40.86,124.4) ; v1(40.86,138.29) 41.495,138.925 J9.52@41.495,139.895
  Bottom Layer w0.293: v1(40.86,4.7) v1(40.86,18.59) ; v1(40.86,21.8) v1(40.86,35.69) ; v1(40.86,38.9) v1(40.86,52.79) ; v1(40.86,56) v1(40.86,69.89) ; v1(40.86,73.1) v1(40.86,86.99) ; v1(40.86,90.2) v1(40.86,104.09) ; v1(40.86,107.3) v1(40.86,121.19) ; v1(40.86,124.4) v1(40.86,138.29)
GPIO4: J1.50 J2.50 J3.50 J4.50 J5.50 J6.50 J7.50 J8.50 J9.50 | length 142.9
  Top Layer w0.293: v1(42.13,4.7) 42.765,4.065 J1.50@42.765,3.095 ; v1(42.13,18.59) 42.765,19.225 ; v1(42.13,21.8) 42.765,21.165 ; v1(42.13,35.69) 42.765,36.325 42.765,38.265 v1(42.13,38.9) ; v1(42.13,52.79) 42.765,53.425 42.765,55.365 v1(42.13,56) ; v1(42.13,69.89) 42.765,70.525 42.765,72.465 v1(42.13,73.1) ; v1(42.13,86.99) 42.765,87.625 42.765,89.565 v1(42.13,90.2) ; v1(42.13,104.09) 42.765,104.725 42.765,106.665 v1(42.13,107.3) ; v1(42.13,121.19) 42.765,121.825 42.765,123.765 v1(42.13,124.4) ; v1(42.13,138.29) 42.765,138.925 J9.50@42.765,139.895 ; 42.765,19.225 42.765,21.165 ; 42.765,19.225 42.765,21.165
  Bottom Layer w0.293: v1(42.13,4.7) v1(42.13,18.59) ; v1(42.13,21.8) v1(42.13,35.69) ; v1(42.13,38.9) v1(42.13,52.79) ; v1(42.13,56) v1(42.13,69.89) ; v1(42.13,73.1) v1(42.13,86.99) ; v1(42.13,90.2) v1(42.13,104.09) ; v1(42.13,107.3) v1(42.13,121.19) ; v1(42.13,124.4) v1(42.13,138.29)
GPIO5: J1.48 J2.48 J3.48 J4.48 J5.48 J6.48 J7.48 J8.48 J9.48 | length 141
  Top Layer w0.293: v1(43.4,4.7) 44.035,4.065 J1.48@44.035,3.095 ; v1(43.4,18.59) 44.035,19.225 J2.48@44.035,20.195 44.035,21.165 v1(43.4,21.8) ; v1(43.4,35.69) 44.035,36.325 44.035,38.265 v1(43.4,38.9) ; v1(43.4,52.79) 44.035,53.425 44.035,55.365 v1(43.4,56) ; v1(43.4,69.89) 44.035,70.525 44.035,72.465 v1(43.4,73.1) ; v1(43.4,86.99) 44.035,87.625 44.035,89.565 v1(43.4,90.2) ; v1(43.4,104.09) 44.035,104.725 44.035,106.665 v1(43.4,107.3) ; v1(43.4,121.19) 44.035,121.825 44.035,123.765 v1(43.4,124.4) ; v1(43.4,138.29) 44.035,138.925 J9.48@44.035,139.895
  Bottom Layer w0.293: v1(43.4,4.7) v1(43.4,18.59) ; v1(43.4,21.8) v1(43.4,35.69) ; v1(43.4,38.9) v1(43.4,52.79) ; v1(43.4,56) v1(43.4,69.89) ; v1(43.4,73.1) v1(43.4,86.99) ; v1(43.4,90.2) v1(43.4,104.09) ; v1(43.4,107.3) v1(43.4,121.19) ; v1(43.4,124.4) v1(43.4,138.29)
GPIO6: J1.46 J2.46 J3.46 J4.46 J5.46 J6.46 J7.46 J8.46 J9.46 | length 141
  Top Layer w0.293: v1(44.67,4.7) 45.305,4.065 J1.46@45.305,3.095 ; v1(44.67,18.59) 45.305,19.225 J2.46@45.305,20.195 45.305,21.165 v1(44.67,21.8) ; v1(44.67,35.69) 45.305,36.325 45.305,38.265 v1(44.67,38.9) ; v1(44.67,52.79) 45.305,53.425 45.305,55.365 v1(44.67,56) ; v1(44.67,69.89) 45.305,70.525 45.305,72.465 v1(44.67,73.1) ; v1(44.67,86.99) 45.305,87.625 45.305,89.565 v1(44.67,90.2) ; v1(44.67,104.09) 45.305,104.725 45.305,106.665 v1(44.67,107.3) ; v1(44.67,121.19) 45.305,121.825 45.305,123.765 v1(44.67,124.4) ; v1(44.67,138.29) 45.305,138.925 J9.46@45.305,139.895
  Bottom Layer w0.293: v1(44.67,4.7) v1(44.67,18.59) ; v1(44.67,21.8) v1(44.67,35.69) ; v1(44.67,38.9) v1(44.67,52.79) ; v1(44.67,56) v1(44.67,69.89) ; v1(44.67,73.1) v1(44.67,86.99) ; v1(44.67,90.2) v1(44.67,104.09) ; v1(44.67,107.3) v1(44.67,121.19) ; v1(44.67,124.4) v1(44.67,138.29)